# Altium PCB PCB_FT-LINK-v2.pcbdoc
Units mm, origin at the board's own origin, x right, y up, seen from the top; angles counter-clockwise.
Board outline 68.42 x 45.72 mm, 2 copper layers (Top Layer, Bottom Layer); 38 components, 36 nets, 173 pads, 36 vias.
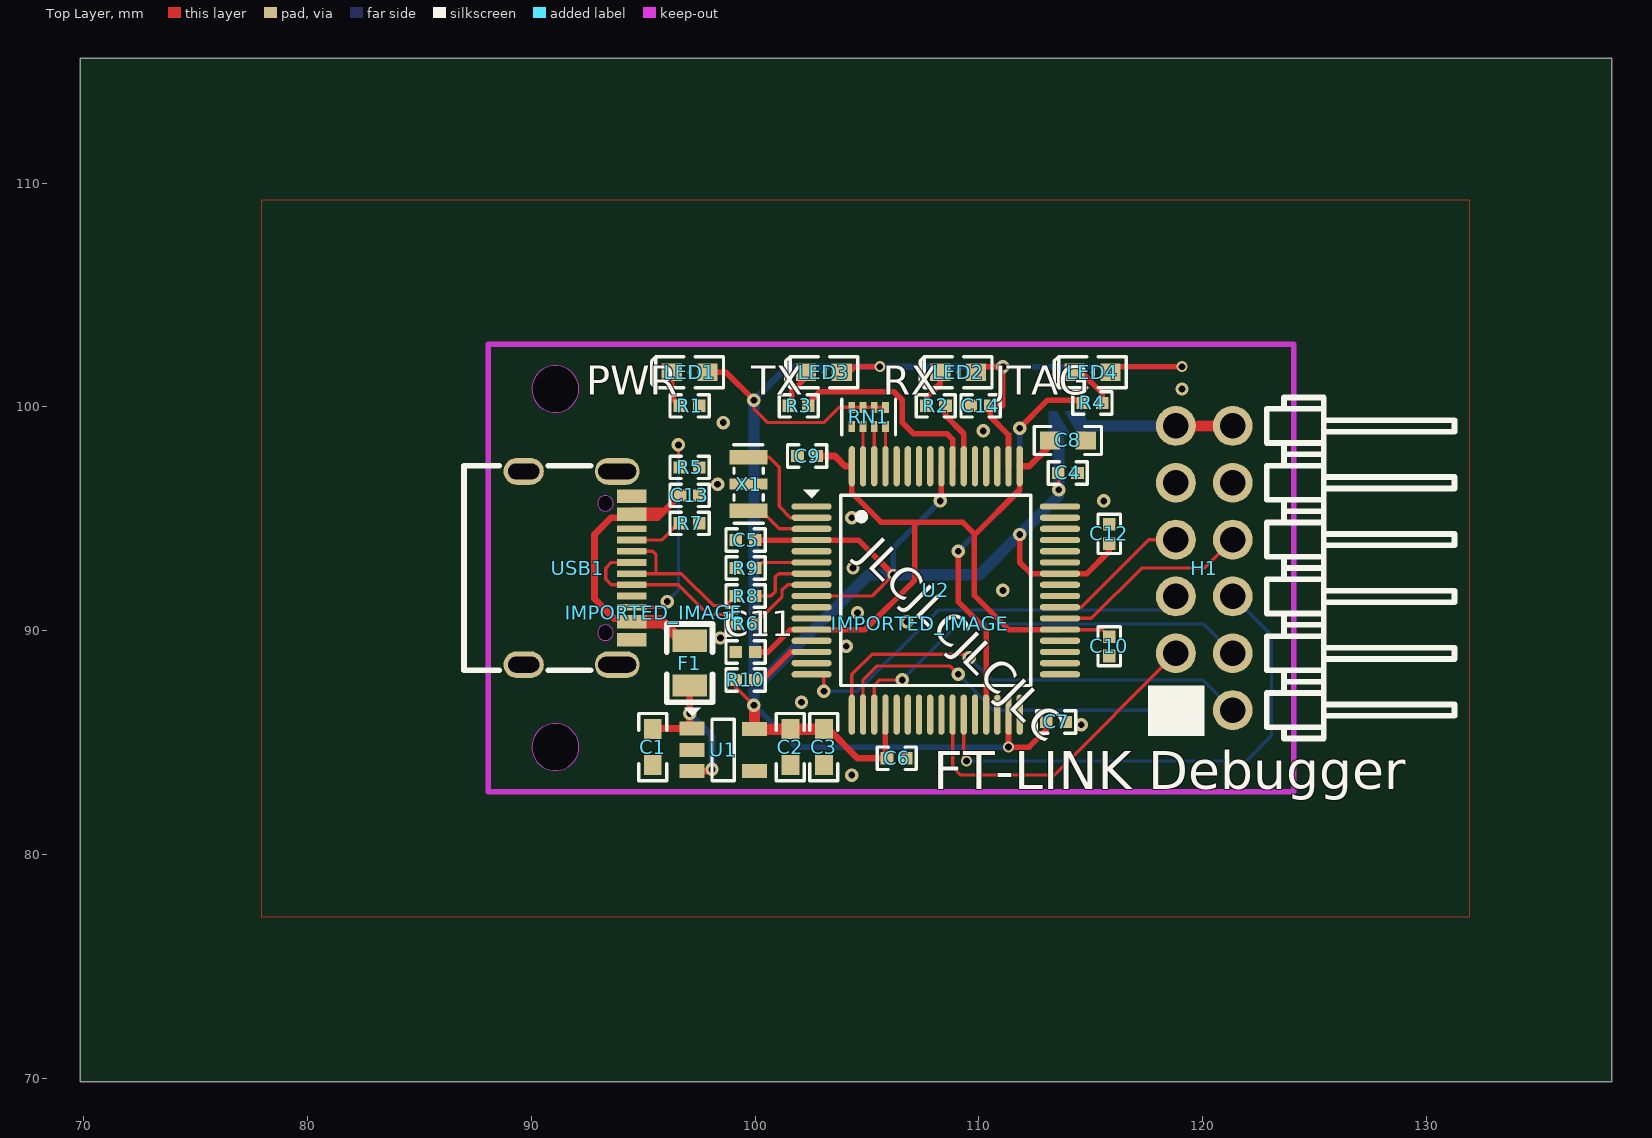
[diagram p0: Top Layer view]
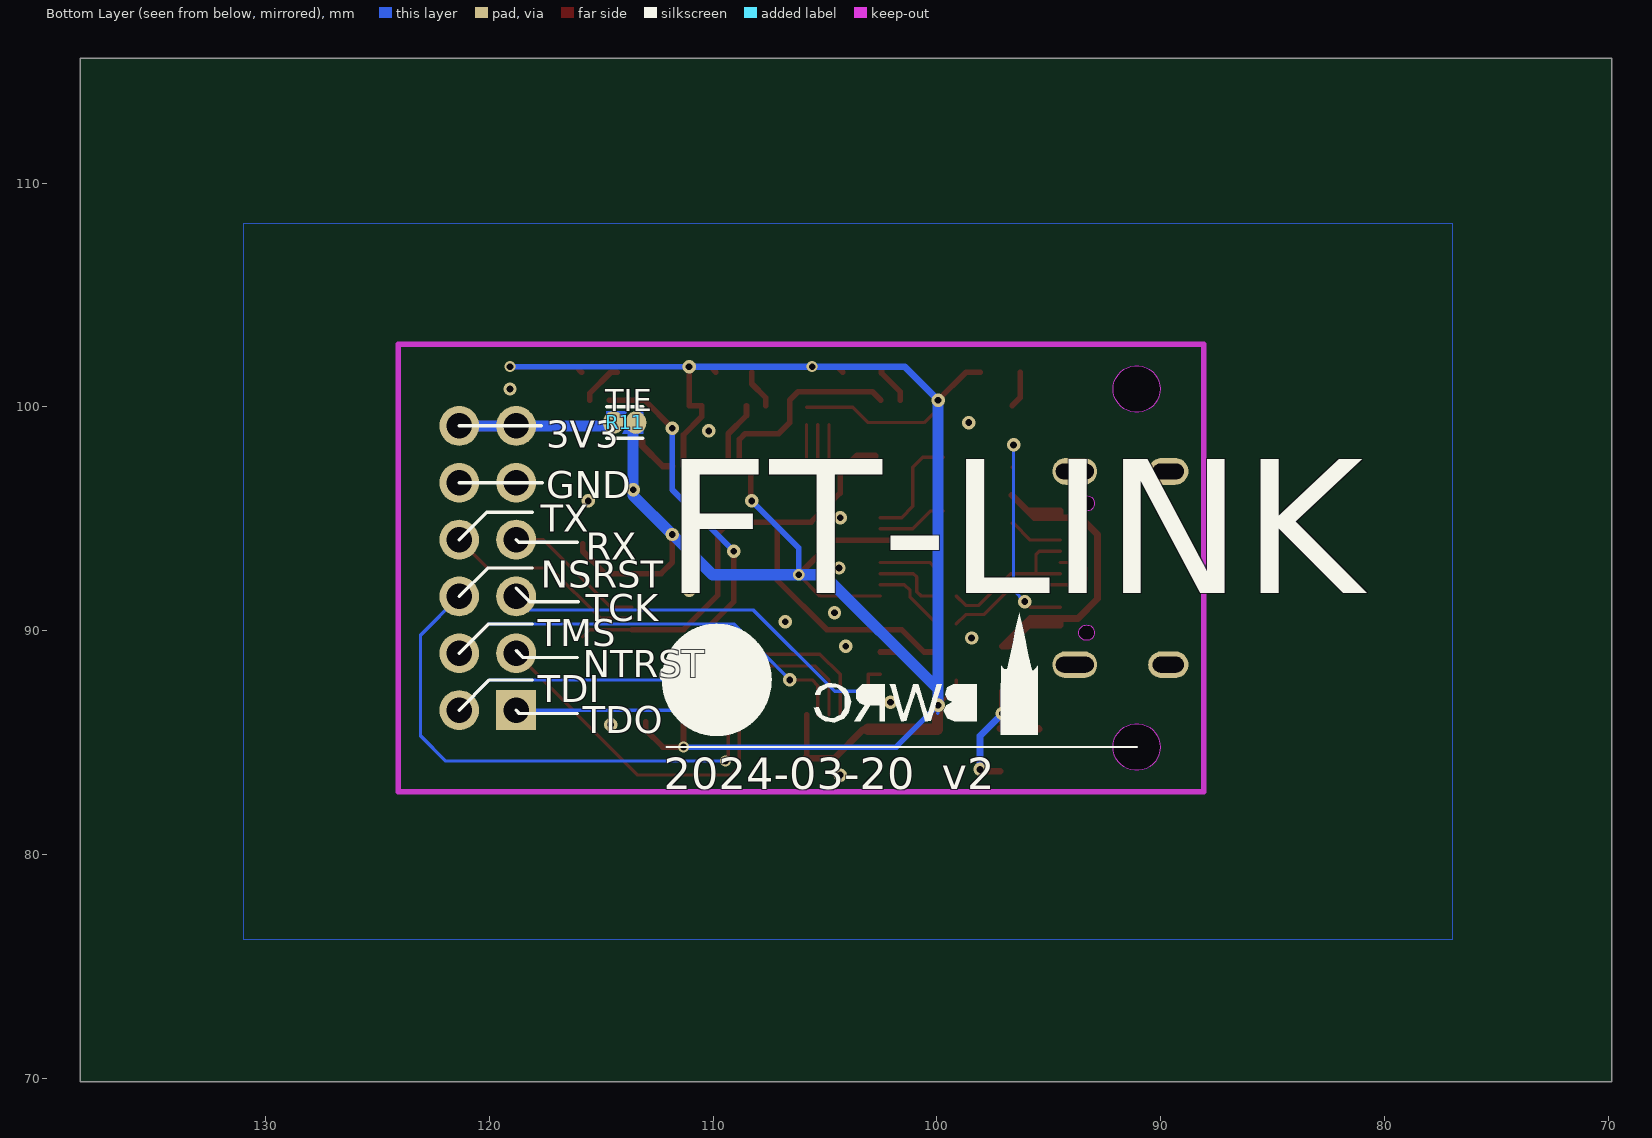
[diagram p1: Bottom Layer view, seen from below]

## Layer stack, top to bottom
Top Layer: signal copper (thickness not stored)
Dielectric: dielectric 0.32, FR-4, Dk 4.8
Bottom Layer: signal copper (thickness not stored)

## Board outline
138.275,69.85 69.85,69.85 69.85,115.575 138.275,115.575
cut-out: 92.125,84.8 ccw(c91.075,84.8) 90.025,84.8 ccw(c91.075,84.8)
cut-out: 92.125,100.8 ccw(c91.075,100.797) 90.025,100.8 ccw(c91.075,100.803)

## Components (designator, comment, footprint, x,y, rotation, side; value= is the part's Value field where it differs from the comment)
C1 "10u" CAPA-0603 95.426,84.8 r90 top
C2 "10u" CAPA-0603 101.575,84.8 r90 top
C3 "10u" CAPA-0603 103.075,84.8 r90 top
C4 "100n" CAPA-0402 113.975,97.05 r180 top
C5 "100n" CAPA-0402 99.575,94.05 r0 top
C6 "100n" CAPA-0402 106.325,84.3 r180 top
C7 "100n" CAPA-0402 113.45,85.925 r180 top
C8 "CAPA-0603_3u3_25V" CAPA-0603 113.975,98.5 r0 top
C9 "100n" CAPA-0402 102.325,97.802 r0 top
C10 "100n" CAPA-0402 115.825,89.3 r90 top
C11 "100n" CAPA-0402 99.575,89.05 r0 top
C12 "100n" CAPA-0402 115.825,94.324 r270 top
C13 "10n" CAPA-0402 97.075,96.05 r180 top
C14 "100n" CAPA-0402 110.075,100.05 r0 top
F1 "6V 2A" R0805 97.075,88.55 r270 top
H1 "A2541WR-2X6P" CONN-TH_A2541WR-2X6P 120.075,92.8 r270 top
IMPORTED_IMAGE "IMPORTED_IMAGE" IMPORTED_IMAGE 107.387,90.3 r0 top
IMPORTED_IMAGE "IMPORTED_IMAGE" IMPORTED_IMAGE 95.488,90.8 r0 top
LED1 "LED-0603_R" LED-0603 97.075,101.55 r180 top
LED2 "LED-0603_W" LED-0603 109.075,101.55 r180 top
LED3 "LED-0603_W" LED-0603 103.075,101.55 r180 top
LED4 "LED-0603_B" LED-0603 115.075,101.55 r180 top
R1 "RES-0402_470R" RES-0402 97.075,100.05 r180 top
R2 "RES-0402_470R" RES-0402 108.075,100.05 r180 top
R3 "RES-0402_470R" RES-0402 101.95,100.05 r180 top
R4 "RES-0402_470R" RES-0402 115.075,100.175 r0 top
R5 "5k1" RES-0402 97.075,97.3 r0 top
R6 "22R" RES-0402 99.575,90.3 r0 top
R7 "5k1" RES-0402 97.075,94.8 r0 top
R8 "22R" RES-0402 99.575,91.55 r0 top
R9 "RES-0402_12k" RES-0402 99.575,92.8 r0 top
R10 "RES-0402_1k" RES-0402 99.575,87.8 r180 top
R11 "RES-0402_TIE" RES-0402-TIE 113.95,99.3 r180 bottom
RN1 "RES-0402x4_10k" RES-ARRAY-SMD_0402-8P-L2.0-W1.0-BL 105.075,99.55 r180 top
U1 "AP2112K-3.3TRG1" SOT-25-5_L3.0-W1.8-P0.95-LS3.0-BR 98.575,84.675 r180 top
U2 "FT2232HL" LQFP-64_L10.0-W10.0-P0.50-LS12.0-TL 108.075,91.8 r0 top
USB1 "USB-TYPEC" USB-C-SMD_KH-TYPE-C-16P 92.075,92.8 r270 top
X1 "CSTNE12M0GH5C000R0" OSC-SMD_3P-L3.2-W1.3-P1.2-L 99.709,96.55 r90 top

## Footprints (in the part's own frame and the unit in brackets; to place one, negate y for a bottom-side part, rotate by r counter-clockwise, add the part's x,y. Pads: shape width x height; smd on the part's side, far side on the other; paste and mask are expansions set on the pad)
CAPA-0402 [mm]
  rect 0.566x0.54 smd: 1(-0.433,0) 2(0.433,0)
  silkscreen extent -0.87,-0.5 0.87,0.5
CAPA-0603 [mm]
  rect 0.9x0.8 smd: 1(-0.799,0) 2(0.802,0)
  silkscreen extent -1.5,-0.62 1.5,0.62
CONN-TH_A2541WR-2X6P [mil]
  rect 70x70 hole 45: 1(250,-50)
  round 70 hole 45: 2(250,50) 3(150,-50) 4(150,50) 5(50,-50) 6(50,50) 7(-50,-50) 8(-50,50) 9(-150,-50) 10(-150,50) 11(-250,-50) 12(-250,50)
  silkscreen extent -300,110 300,440
IMPORTED_IMAGE [mm]
LED-0603 [mm]
  rect 0.9x0.8 smd: 1(0.8,0) 2(-0.8,0)
  silkscreen extent -1.51,-0.69 1.7,0.69
LQFP-64_L10.0-W10.0-P0.50-LS12.0-TL [mm]
  oval 1.8x0.28 smd: 1(-5.55,3.75) 2(-5.55,3.25) 3(-5.55,2.75) 4(-5.55,2.25) 5(-5.55,1.75) 6(-5.55,1.25) 7(-5.55,0.75) 8(-5.55,0.25) 9(-5.55,-0.25) 10(-5.55,-0.75) 11(-5.55,-1.25) 12(-5.55,-1.75) 13(-5.55,-2.25) 14(-5.55,-2.75) 15(-5.55,-3.25) 16(-5.55,-3.75) 33(5.55,-3.75) 34(5.55,-3.25) 35(5.55,-2.75) 36(5.55,-2.25) 37(5.55,-1.75) 38(5.55,-1.25) 39(5.55,-0.75) 40(5.55,-0.25) 41(5.55,0.25) 42(5.55,0.75) 43(5.55,1.25) 44(5.55,1.75) 45(5.55,2.25) 46(5.55,2.75) 47(5.55,3.25) 48(5.55,3.75)
  oval 0.28x1.8 smd: 17(-3.75,-5.55) 18(-3.25,-5.55) 19(-2.75,-5.55) 20(-2.25,-5.55) 21(-1.75,-5.55) 22(-1.25,-5.55) 23(-0.75,-5.55) 24(-0.25,-5.55) 25(0.25,-5.55) 26(0.75,-5.55) 27(1.25,-5.55) 28(1.75,-5.55) 29(2.25,-5.55) 30(2.75,-5.55) 31(3.25,-5.55) 32(3.75,-5.55) 49(3.75,5.55) 50(3.25,5.55) 51(2.75,5.55) 52(2.25,5.55) 53(1.75,5.55) 54(1.25,5.55) 55(0.75,5.55) 56(0.25,5.55) 57(-0.25,5.55) 58(-0.75,5.55) 59(-1.25,5.55) 60(-1.75,5.55) 61(-2.25,5.55) 62(-2.75,5.55) 63(-3.25,5.55) 64(-3.75,5.55)
  silkscreen extent -5.92,-4.25 4.25,4.5
OSC-SMD_3P-L3.2-W1.3-P1.2-L [mm]
  rect 0.65x1.7 smd: 1(-1.2,0) 3(1.2,0)
  rect 0.5x1.7 smd: 2(0,0)
  silkscreen extent -1.75,-0.66 1.75,0.66
R0805 [mm]
  rect 1x1.55 smd: 1(-1,0) 2(1,0)
  silkscreen extent -1.75,-1.02 1.75,1.02
RES-0402 [mm]
  rect 0.566x0.54 smd: 1(-0.433,0) 2(0.433,0)
  silkscreen extent -0.87,-0.5 0.87,0.5
RES-0402-TIE [mm]
  oval 0.931x1 smd: 1(-0.5,0) 2(0.5,0)
  round 0 smd: 4(0.526,0.017)
  Top Layer region: 0.526,0.017 0.526,0.017
  Top Layer region: -0.465,-0.5 0.109,0.5 -0.822,0.5 -0.822,-0.5
  Top Layer region: 0.465,0.5 -0.109,-0.5 0.822,-0.5 0.822,0.5
  silkscreen extent -0.8,-0.7 0.8,0.7
RES-ARRAY-SMD_0402-8P-L2.0-W1.0-BL [mm]
  rect 0.3x0.505 smd: 1(-0.75,0.427) 2(-0.25,0.427) 3(0.25,0.427) 4(0.75,0.427) 5(0.75,-0.427) 6(0.25,-0.427) 7(-0.25,-0.427) 8(-0.75,-0.427)
  silkscreen extent -1.2,-0.8 1.2,0.8
SOT-25-5_L3.0-W1.8-P0.95-LS3.0-BR [mil]
  rect 43.5x24.5 smd: 1(54.99,-37.5) 2(54.99,0.5) 3(54.99,37.5) 4(-55.01,37.5) 5(-55.01,-36.5)
  silkscreen extent -20,-74 69,54
USB-C-SMD_KH-TYPE-C-16P [mm]
  oval 1.2x2 hole 0.7 slot 1.7 at 90 deg: 1(-4.32,1.765) 2(4.32,1.765)
  oval 1.2x1.8 hole 0.7 slot 1.4 at 90 deg: 3(-4.32,-2.415) 4(4.32,-2.415)
  rect 0.3x1.3 smd: A1(-3.35,2.415) A4(-2.55,2.415) A5(-1.25,2.415) A6(-0.25,2.415) A7(0.25,2.415) A8(1.25,2.415) A9(2.55,2.415) A12(3.35,2.415) B1(3.05,2.415) B4(2.25,2.415) B5(1.75,2.415) B6(0.75,2.415) B7(-0.75,2.415) B8(-1.75,2.415) B9(-2.25,2.415) B12(-3.05,2.415)
  Multi-Layer board cut-out: -2.89,1.585 -3.064,1.537 -3.19,1.409 -3.237,1.235 -3.19,1.061 -3.064,0.933 -2.89,0.885 -2.89,0.885 -2.716,0.933 -2.59,1.061 -2.543,1.235 -2.59,1.409 -2.716,1.537 -2.89,1.585
  Multi-Layer board cut-out: 2.89,1.585 2.716,1.537 2.59,1.409 2.543,1.235 2.59,1.061 2.716,0.933 2.89,0.885 2.89,0.885 3.064,0.933 3.19,1.061 3.237,1.235 3.19,1.409 3.064,1.537 2.89,1.585
  Multi-Layer keep-out region: -2.89,1.585 -3.064,1.537 -3.19,1.409 -3.237,1.235 -3.19,1.061 -3.064,0.933 -2.89,0.885 -2.89,0.885 -2.716,0.933 -2.59,1.061 -2.543,1.235 -2.59,1.409 -2.716,1.537 -2.89,1.585
  Multi-Layer keep-out region: 2.89,1.585 2.716,1.537 2.59,1.409 2.543,1.235 2.59,1.061 2.716,0.933 2.89,0.885 2.89,0.885 3.064,0.933 3.19,1.061 3.237,1.235 3.19,1.409 3.064,1.537 2.89,1.585
  silkscreen extent -4.57,-5.08 4.57,0.57

## Via types
v1: diameter 0.6, hole 0.3, Top Layer to Bottom Layer, 31 vias
v2: diameter 0.5, hole 0.3, Top Layer to Bottom Layer, 5 vias

## Nets (pads, with @x,y where several pads share a name; then routed paths per layer and width w, separated by ;. In a path a pad name is that pad's centre, name@x,y a point inside that pad or via, vN(x,y) a via of type N, cw(c..) or ccw(c..) an arc to the next point about the centre after c; other vN are vias at no path point)
3V3: C2.2 C3.2 C4.2 C5.2 C6.2 C7.2 C12.2 C14.2 LED1.2 LED2.2 LED3.2 LED4.2 R10.2 R11.2 RN1.5 RN1.6 RN1.7 RN1.8 U1.5 U2.4 U2.9 U2.20 U2.31 U2.42 U2.50 U2.56 | length 125.9
  Top Layer w0.15: R10.2 99.142,87.483 v1(99.95,86.675) ; v1(99.95,100.3) 99.95,99.925 100.575,99.3 103.075,99.3 103.752,99.977 RN1.5 RN1.6 RN1.7 RN1.8 ; U2.9 105.225,91.55 v2(106.175,92.5) ; C4.2 113.575,97.017 v1(113.575,96.3)
  Top Layer w0.25: LED1.2@98.072,101.55 98.7,101.55 v1(99.95,100.3) ; C5.2 U2.4 104.625,94.05 v2(106.175,92.5) ; LED3.2@104.202,101.55 104.452,101.8 v2(105.575,101.8) ; C6.2@105.825,84.302 U2.20 ; v1(108.275,95.8) 108.325,95.85 U2.56 ; LED2.2 110.125,101.8 v1(111.075,101.8) 111.075,100.05 C14.2 110.508,99.567 111.325,98.75 U2.50 ; U2.31 v2(111.325,84.8) 112.245,84.8 113.017,85.572 C7.2 ; v1(111.825,94.3) 111.825,93.05 112.325,92.55 U2.42 114.825,92.55 115.825,93.55 C12.2 ; LED4.2 116.125,101.8 v2(119.075,101.8)
  Top Layer w0.3: C3.2 103.273,85.602 104.573,84.302 C6.2@105.825,84.302 ; C6.2@105.827,84.3 C6.2
  Top Layer w0.5: v1(99.95,86.675) 99.972,86.653 99.972,85.6 C2.2 C3.2
  Bottom Layer w0.15: v1(99.95,86.675) 99.95,86.325 99.975,86.3
  Bottom Layer w0.25: v1(99.95,86.675) 101.825,84.8 v2(111.325,84.8) ; v2(106.175,92.5) 106.175,93.7 v1(108.275,95.8) ; v1(111.075,101.8) v2(119.075,101.8)
  Bottom Layer w0.3: v1@99.951,100.301 101.45,101.8 v2(105.575,101.8) v1(111.075,101.8)
  Bottom Layer w0.5: v1(99.95,86.675) v1(99.95,100.3) ; v1(99.95,86.675) 99.95,87.385 105.065,92.5 v2(106.175,92.5) 110.024,92.5 v1@111.824,94.3 ; v1(111.825,94.3) 113.575,96.05 113.575,98.99 R11.2@113.45,99.115
5V: C1.2 F1.2 U1.1 U1.3 | length 7
  Top Layer w0.3: C1.2 95.452,85.627 U1.1 ; U1.1@97.075,85.902 v1(97.075,86.3) F1.2@97.075,87.3 ; U1.3 98.053,83.722 98.075,83.744 v1(98.075,83.8)
  Bottom Layer w0.3: v1(97.075,86.3) 98.075,85.3 v1(98.075,83.8)
$C13_2: C13.2 F1.1 USB1.A4 USB1.A9 USB1.B4 USB1.B9 | length 17.6
  Top Layer w0.3: USB1.B9@94.489,95.05 93.575,95.05 92.826,94.301 92.826,91.426 93.699,90.55 USB1.B4@94.489,90.55 ; C13.2 95.942,95.35 ; USB1.B4 USB1.A9 95.876,90.25 96.826,89.3 97.075,89.3 95.825,90.55 USB1.B4 ; 95.942,95.35 95.642,95.05 USB1.B9 USB1.A4 95.942,95.35
$H1_11: H1.11 H1.12 R11.1 | length 7
  Bottom Layer w0.5: R11.1 114.6,99.15 H1.11 H1.12
$H2_11:  | length 2.5
  Top Layer w0.5: 118.805,99.15 121.345,99.15
$LED1_1: LED1.1 R1.2 | length 1.7
  Top Layer w0.25: LED1.1 96.275,100.417 R1.2
$LED2_1: LED2.1 R2.2 | length 1.8
  Top Layer w0.25: R2.2 107.642,100.404 108.275,101.036 LED2.1
$LED3_1: LED3.1 R3.2 | length 1.7
  Top Layer w0.25: R3.2@101.642,100.3 101.642,100.681 102.477,101.516 LED3.1@102.477,101.69
$LED4_1: LED4.1 R4.2 | length 1.9
  Top Layer w0.25: LED4.1 114.575,101.55 115.508,100.617 R4.2@115.508,100.3
$R5_1: R5.1 USB1.B5 | length 9.9
  Top Layer w0.15: USB1.B5 95.825,91.05 v1(96.075,91.3) ; v1(96.575,98.3) 96.575,97.367 R5.1
  Bottom Layer w0.15: v1(96.075,91.3) 96.575,91.8 v1(96.575,98.3)
$R6_1: R6.1 USB1.A6 USB1.B6 | length 8.4
  Top Layer w0.15: USB1.A6 93.575,93.05 93.325,92.8 93.325,92.3 93.575,92.05 USB1.B6 96.575,92.05 97.903,90.722 98.72,90.722 R6.1
$R7_1: R7.1 USB1.A5 | length 2.5
  Top Layer w0.15: USB1.A5 95.825,94.05 96.575,94.8 R7.1
$R8_1: R8.1 USB1.A7 USB1.B7 | length 7.4
  Top Layer w0.15: USB1.A7 95.575,92.55 ; USB1.B7 95.425,93.55 95.575,93.4 95.575,92.55 ; R8.1 98.72,91.128 98.122,91.128 96.7,92.55 95.575,92.55
$R9_2: R9.2 U2.6 | length 2.6
  Top Layer w0.15: R9.2@100.075,92.8 100.325,93.05 U2.6
$R10_1: R10.1 U2.14 | length 3
  Top Layer w0.25: R10.1 100.325,87.8 101.575,89.05 U2.14
$RN1_1: RN1.1 U2.61 | length 1.8
  Top Layer w0.15: U2.61 RN1.1@105.825,99.195
$RN1_2: RN1.2 U2.62 | length 1.8
  Top Layer w0.15: U2.62 RN1.2@105.325,99.195
$RN1_3: RN1.3 U2.63 | length 1.8
  Top Layer w0.15: U2.63 RN1.3@104.825,99.195
$U2_2: U2.2 X1.3 | length 5
  Top Layer w0.15: X1.3 100.625,97.75 101.075,97.3 101.075,95.55 101.575,95.05 U2.2
$U2_3: U2.3 X1.1 | length 3.1
  Top Layer w0.15: X1.1 100.275,95.35 101.075,94.55 U2.3
GND: C1.1 C2.1 C3.1 C4.1 C5.1 C6.1 C7.1 C8.2 C9.1 C10.1 C11.1 C12.1 C13.1 C14.1 H1.9 H1.10 R1.1 R5.2 R7.2 R9.1 U1.2 U2.1 U2.5 U2.10 U2.11 U2.13 U2.15 U2.25 U2.35 U2.47 U2.51 USB1.1 USB1.2 USB1.3 USB1.4 USB1.A1 USB1.A12 USB1.B1 USB1.B12 X1.2
  other v1: 104.325,83.55 114.575,85.8 102.075,86.8 104.075,89.3 98.45,89.675 106.775,90.4 104.575,90.8 111.075,91.8 104.375,92.8 104.325,95.05 115.575,95.8 98.325,96.55 110.2,98.925 98.575,99.3 119.075,100.8
JTAGLED: R4.1 U2.29 | length 17.8
  Top Layer w0.25: v1(109.075,93.55) 109.075,91.3 110.325,90.05 U2.29 ; v1(111.825,99.05) 113.075,100.3 R4.1@114.642,100.3
  Bottom Layer w0.25: v1(109.075,93.55) 111.825,96.3 v1(111.825,99.05)
NSRST: H1.6 U2.27 | length 23.2
  Top Layer w0.15: U2.27 109.325,84.3 v2(109.45,84.175)
  Bottom Layer w0.15: v2(109.45,84.175) 121.95,84.175 123.075,85.3 123.075,89.8 H1.6
NTRST: H1.3 U2.26 | length 14.7
  Top Layer w0.15: U2.26 108.825,83.925 109.2,83.55 113.365,83.55 H1.3
RXD: H1.7 U2.39 | length 6.4
  Top Layer w0.15: U2.39 114.575,91.05 117.595,94.07 H1.7
RXLED: R2.1 U2.54 | length 3
  Top Layer w0.25: R2.1 108.508,99.617 109.325,98.8 U2.54
TCK: H1.5 U2.16 | length 18.8
  Top Layer w0.15: U2.16 103.075,88.05 v1(103.075,87.3)
  Bottom Layer w0.15: v1(103.075,87.3) 104.575,87.3 108.2,90.925 118.2,90.925 H1.5
TDI: H1.2 U2.17 | length 20.2
  Top Layer w0.15: U2.17 104.325,88.05 105.225,88.95 109.425,88.95 v1(109.575,88.8)
  Bottom Layer w0.15: v1(109.575,88.8) 110.575,87.8 119.995,87.8 H1.2
TDO: H1.1 U2.18 | length 16.6
  Top Layer w0.15: U2.18 104.825,87.8 105.45,88.425 108.7,88.425 v1(109.075,88.05)
  Bottom Layer w0.15: v1(109.075,88.05) 110.675,86.45 H1.1
TMS: H1.4 U2.19 | length 19
  Top Layer w0.15: U2.19 105.325,87.55 105.575,87.8 v1(106.575,87.8)
  Bottom Layer w0.15: v1(106.575,87.8) 109.075,90.3 120.035,90.3 H1.4
TXD: H1.8 U2.38 | length 9.2
  Top Layer w0.15: U2.38 115.025,90.55 117.275,92.8 120.075,92.8 H1.8
TXLED: R3.1 U2.55 | length 9.1
  Top Layer w0.25: R3.1@102.508,100.3 102.883,100.675 106.2,100.675 106.575,100.3 106.575,99.3 107.075,98.8 108.575,98.8 108.825,98.55 U2.55
USB_DM: R8.2 U2.7 | length 3.3
  Top Layer w0.15: R8.2 100.7,91.55 100.898,91.748 100.898,92.4 101.048,92.55 U2.7
USB_DP: R6.2 U2.8 | length 3.4
  Top Layer w0.15: R6.2 101.2,91.492 101.2,91.8 101.45,92.05 U2.8
VCORE: C8.1 C9.2 C10.2 C11.2 U2.12 U2.37 U2.49 U2.64 | length 35.6
  Top Layer w0.15: U2.37 115.508,90.05 C10.2
  Top Layer w0.25: C11.2 100.575,89.05 101.575,90.05 U2.12 104.925,90.05 107.126,92.251 107.126,94.851 ; U2.64 104.325,96.15 105.624,94.851 107.126,94.851 ; U2.49 111.825,96.3 109.825,94.3 ; U2.37 111.325,90.05 109.8,91.575 109.8,94.275 109.825,94.3 ; 107.126,94.851 109.274,94.851 109.825,94.3
  Top Layer w0.3: C9.2 103.573,97.802 104.025,97.35 U2.64 ; U2.49 112.25,97.35 113.176,98.276 C8.1
"": R11.4 RN1.4 U1.4 U2.21 U2.22 U2.23 U2.24 U2.28 U2.30 U2.32 U2.33 U2.34 U2.36 U2.40 U2.41 U2.43 U2.44 U2.45 U2.46 U2.48 U2.52 U2.53 U2.57 U2.58 U2.59 U2.60 USB1.A8 USB1.B8

## Polygon pours and split planes (outlines as drawn)
GND on Top Layer (solid, remove dead copper, pour order 0): 77.925,109.225 77.925,77.225 131.925,77.225 131.925,109.225
GND on Bottom Layer (solid, remove dead copper, pour order 1): 76.975,108.2 76.975,76.2 130.975,76.2 130.975,108.2

## Keep-outs
Board Outline Layer:
  lines w0.25 net "": 88.075,82.8 88.075,82.8 ; 88.075,82.8 88.075,82.8 ; 88.075,82.8 88.075,102.791 124.075,102.8 124.075,82.8 88.075,82.8
Multi-Layer:
  region net "": 92.125,84.8 ccw(c91.075,84.8) 90.025,84.8 ccw(c91.075,84.8)
  region net "": 92.125,100.8 ccw(c91.075,100.797) 90.025,100.8 ccw(c91.075,100.803)

## Silkscreen, mask and mechanical layers (free items; w line width, h text height)
Top Silkscreen Layer:
  region net "": 117.575,85.3 120.075,85.3 120.075,87.55 117.575,87.55
  text "PWR" at 92.45,100.55 h1.3
  text "TX" at 99.825,100.55 h1.3
  text "RX" at 105.7,100.55 h1.3
  text "JTAG" at 110.7,100.55 h1.3
  text "JLCJLCJLCJLC" at 104.575,93.3 h1.4 r315
  text "FT-LINK Debugger" at 107.95,82.925 h1.7
Bottom Silkscreen Layer:
  lines w0.1 net "": 91.075,84.8 112.08,84.8
  lines w0.15 net "": 116.02,91.3 118.2,91.3 118.805,91.905 ; 116.075,86.3 118.655,86.3 118.805,86.45 ; 116.075,88.801 118.491,88.801 118.805,89.115 ; 116.075,93.949 118.684,93.949 118.805,94.07 ; 117.641,96.61 121.345,96.61 ; 117.679,99.15 121.345,99.15 ; 118.075,90.3 120.035,90.3 121.345,88.99 ; 118.075,92.8 120.075,92.8 121.345,91.53 ; 118.075,95.3 120.115,95.3 121.345,94.07 ; 118.081,87.8 119.995,87.8 121.345,86.45
  text "TIE" at 114.825,99.8 h1
  text "3V3" at 117.45,98.175 h1.2
  text "GND" at 117.45,95.925 h1.2
  text "TX" at 117.7,94.425 h1.2
  text "RX" at 115.7,93.175 h1.2
  text "NSRST" at 117.7,91.925 h1.2
  text "FT-LINK" at 112.2,91.675 h6
  text "TCK" at 115.7,90.425 h1.2
  text "TMS" at 117.825,89.3 h1.2
  text "NTRST" at 115.825,87.925 h1.2
  text "TDI" at 117.825,86.8 h1.2
  text "TDO" at 115.825,85.425 h1.2
  text "2024-03-20  v2" at 112.2,82.925 h1.4
Mechanical Layer:
  circle w0.025 net "": c91.075,84.8 r1.05
  circle w0.025 net "": c91.075,100.8 r1.05